# Altium PCB Barracuda3D.PcbDoc (part 3 of 3)
Units mil, origin at the board's own origin, x right, y up, seen from the top; angles counter-clockwise.
Board outline 4143.89 x 2810.03 mil, 5 copper layers (Top Layer, Mid-Layer 1, Groun Plane, Power Plane, Bottom Layer), stack 75.73 mil thick; 242 components, 180 nets, 863 pads, 455 vias.
Unrouted connection lines stored in the file: 270.
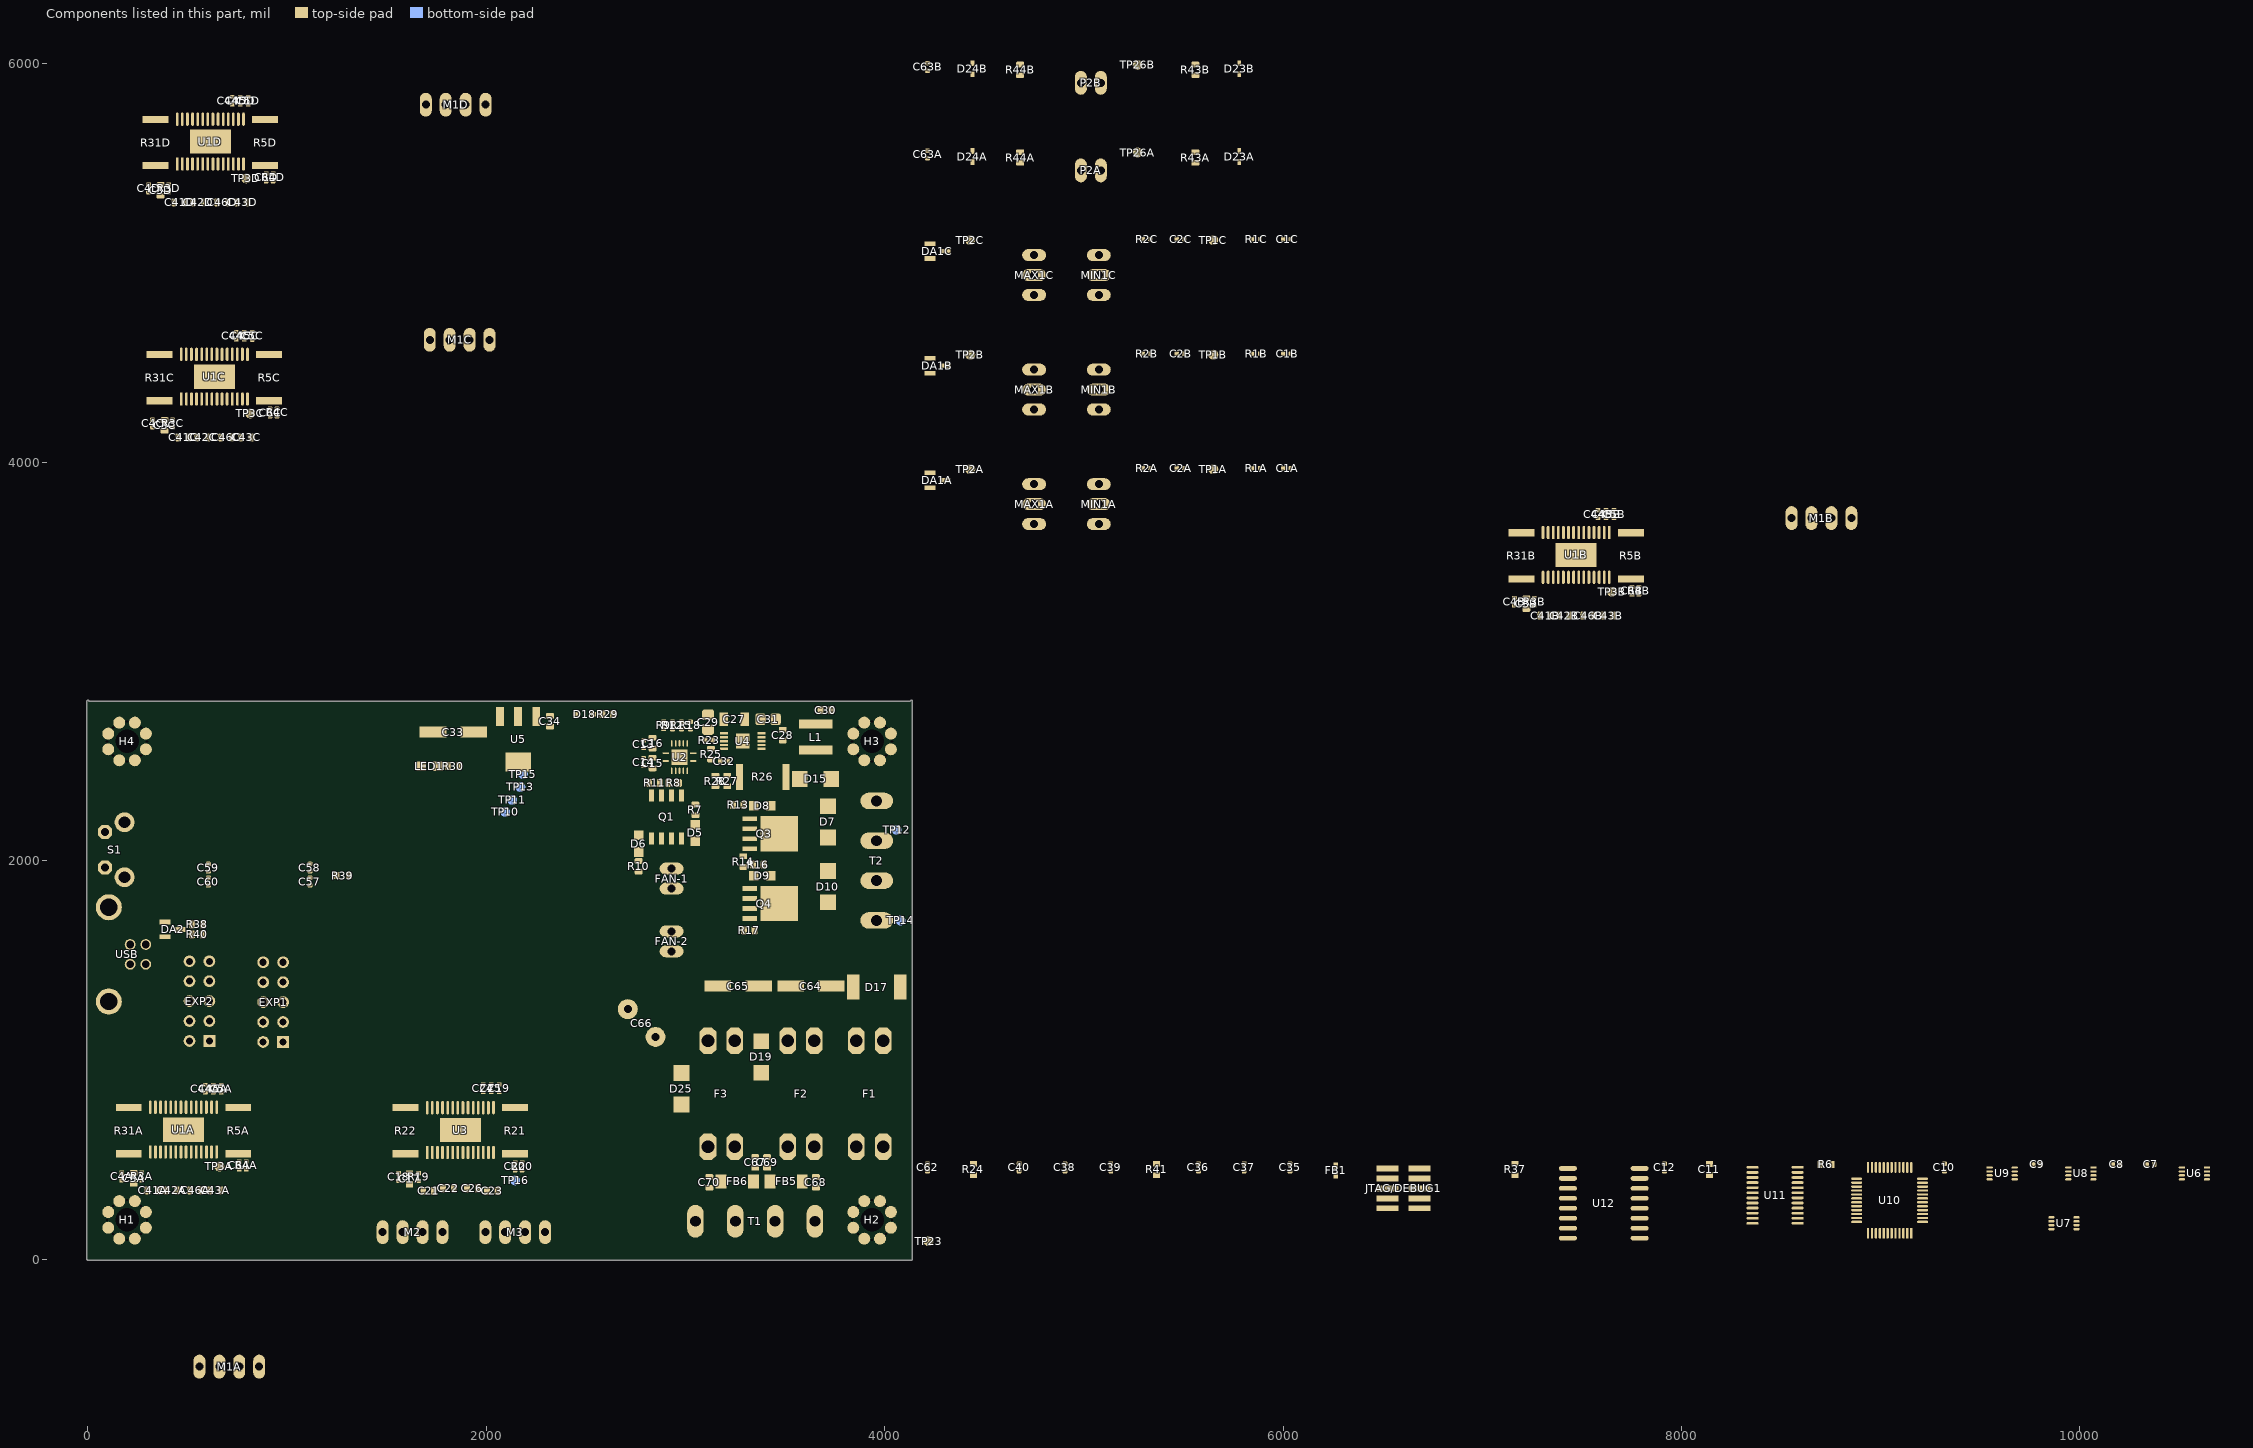
[diagram p5: the components of this part, seen from the top]

## Silkscreen, mask and mechanical layers (free items; w line width, h text height)
Top Overlay:
  circle w5: c4055,375 r42
  rectangle: 10,375 140,1200
  lines w7.87: 460,1045 460,1545
  lines w10: 455.47,1194.41 408.23,1194.41 408.23,1393.23 458.43,1393.23 ; 825.47,1189.41 778.23,1189.41 778.23,1388.23 828.43,1388.23
  text "TR-0" at 2725,2680 h25 r270
  text "MIN" at 1645,2500 h90 r90
  text "TR-1" at 2725,2310 h25 r270
  text "HEAT-0" at 3595,2305 h100 r270
  text "MAX" at 1645,2270 h90 r90
  text "FAN-0" at 3090,2045 h100 r270
  text "HEATBED" at 3585,1975 h100 r270
  text "TR-2" at 2730,1875 h25 r270
  text "FAN-1" at 3090,1680 h100 r270
  text "TR-4" at 2725,1555 h25 r270
  text "HEATERS" at 3760,1510 h100
  text "E" at 2265,1050 h150
  text "X" at 685,920 h150
  text "Z" at 1810,880 h150
  text "HEAT 5A" at 3435,620 h85 r90
  text "MOTORS" at 3035,440 h85 r90
  text "HEATBED 15A" at 3780,440 h85 r90
  text "PWR" at 2925,345 h100
  text "U" at 4034,343 h60
  text "E" at 2825,260 h150
  text "X" at 755,255 h150
  text "Z" at 2295,255 h150
  text "Y" at 1280,235 h150
Mechanical 15:
  lines w10: 0,0 4133.86,0 4133.86,2800 0,2800 0,0

## Text inside footprints (layer, text, board x,y; h text height)
C66: Top Overlay "+" at 2949.82,1059.73 h77.5 r135; Top Overlay "+" at 3011.06,998.48 h77.5 r135
FAN-1: Mechanical 16 "1" at 2992.5,1797.5 h62 r90
FAN-2: Mechanical 16 "1" at 2992.5,1482.5 h62 r90
MAX1A: Mechanical 16 "1" at 4812.5,3627.5 h62 r90
MAX1B: Mechanical 16 "1" at 4812.5,4202.5 h62 r90
MAX1C: Mechanical 16 "1" at 4812.5,4777.5 h62 r90
MIN1A: Mechanical 16 "1" at 5137.5,3627.5 h62 r90
MIN1B: Mechanical 16 "1" at 5137.5,4202.5 h62 r90
MIN1C: Mechanical 16 "1" at 5137.5,4777.5 h62 r90
P2A: Mechanical 16 "1" at 4922.5,5402.5 h62
P2B: Mechanical 16 "1" at 4922.5,5842.5 h62
T1: Top Overlay "1" at 3735,275 h77.5 r180; Top Overlay "2" at 3550,275 h77.5 r180; Top Overlay "3" at 3350,275 h77.5 r180; Top Overlay "4" at 3150,275 h77.5 r180
T2: Top Overlay "1" at 4045,1615 h77.5 r90; Top Overlay "2" at 4045,1800 h77.5 r90; Top Overlay "3" at 4045,2000 h77.5 r90